# Altium PCB Driver.PcbDoc
Units mm, origin at the board's own origin, x right, y up, seen from the top; angles counter-clockwise.
Board outline 20 x 30.48 mm, 2 copper layers (Top Layer, Bottom Layer); 6 components, 14 nets, 46 pads, 4 vias.
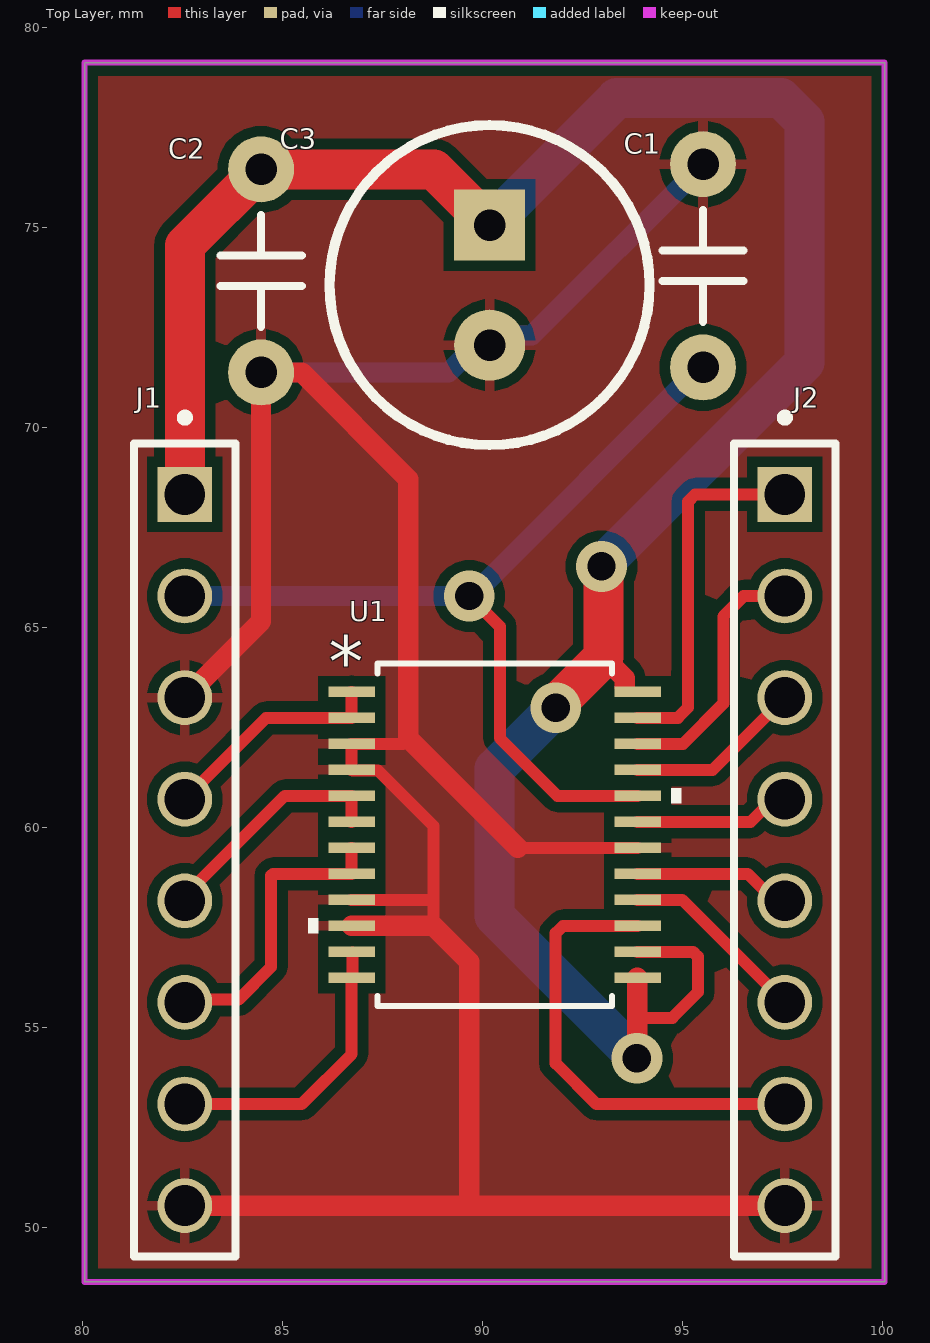
[diagram p0: Top Layer view]
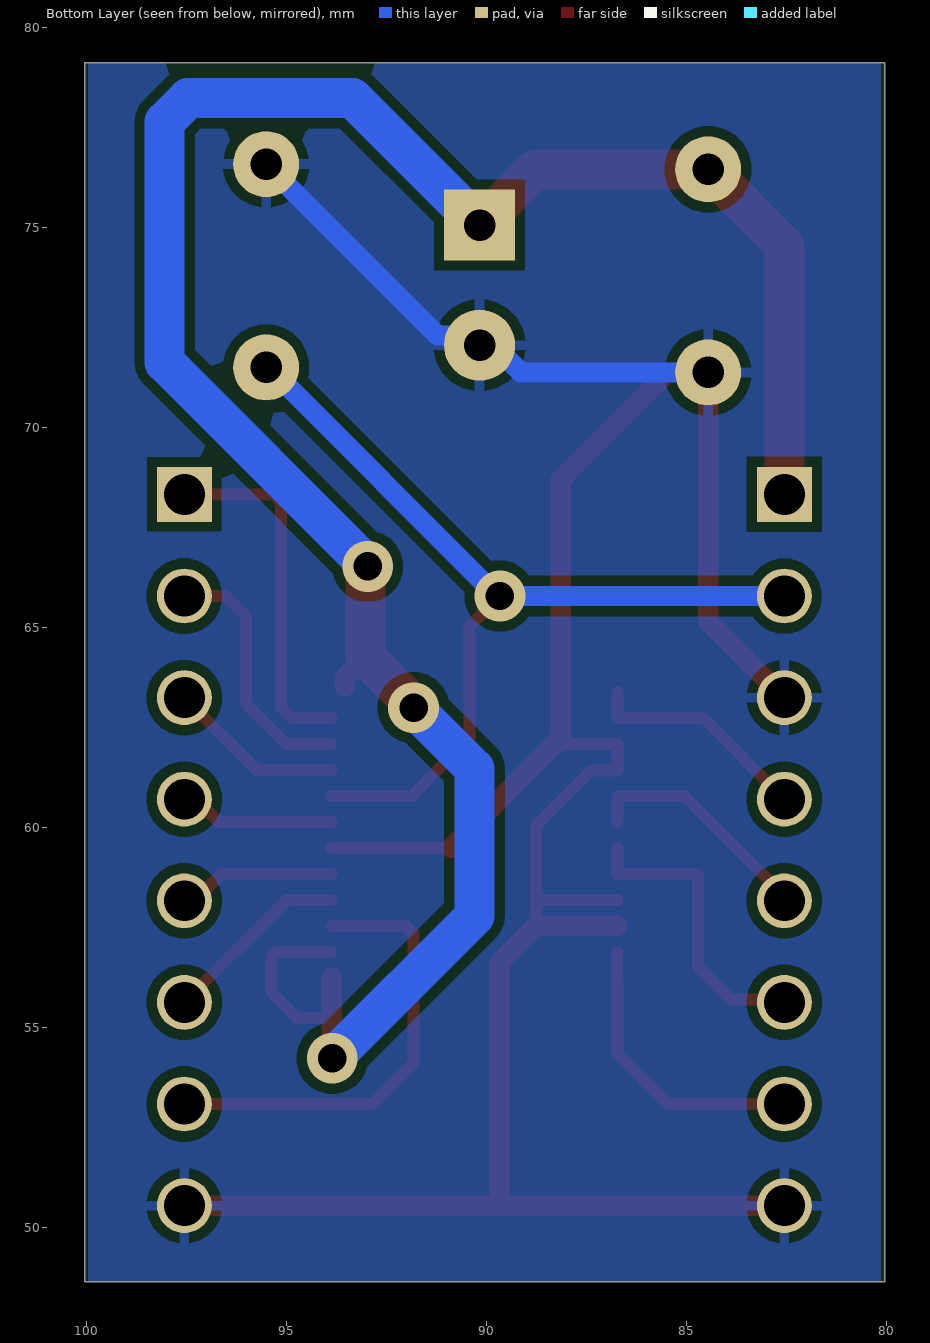
[diagram p1: Bottom Layer view, seen from below]
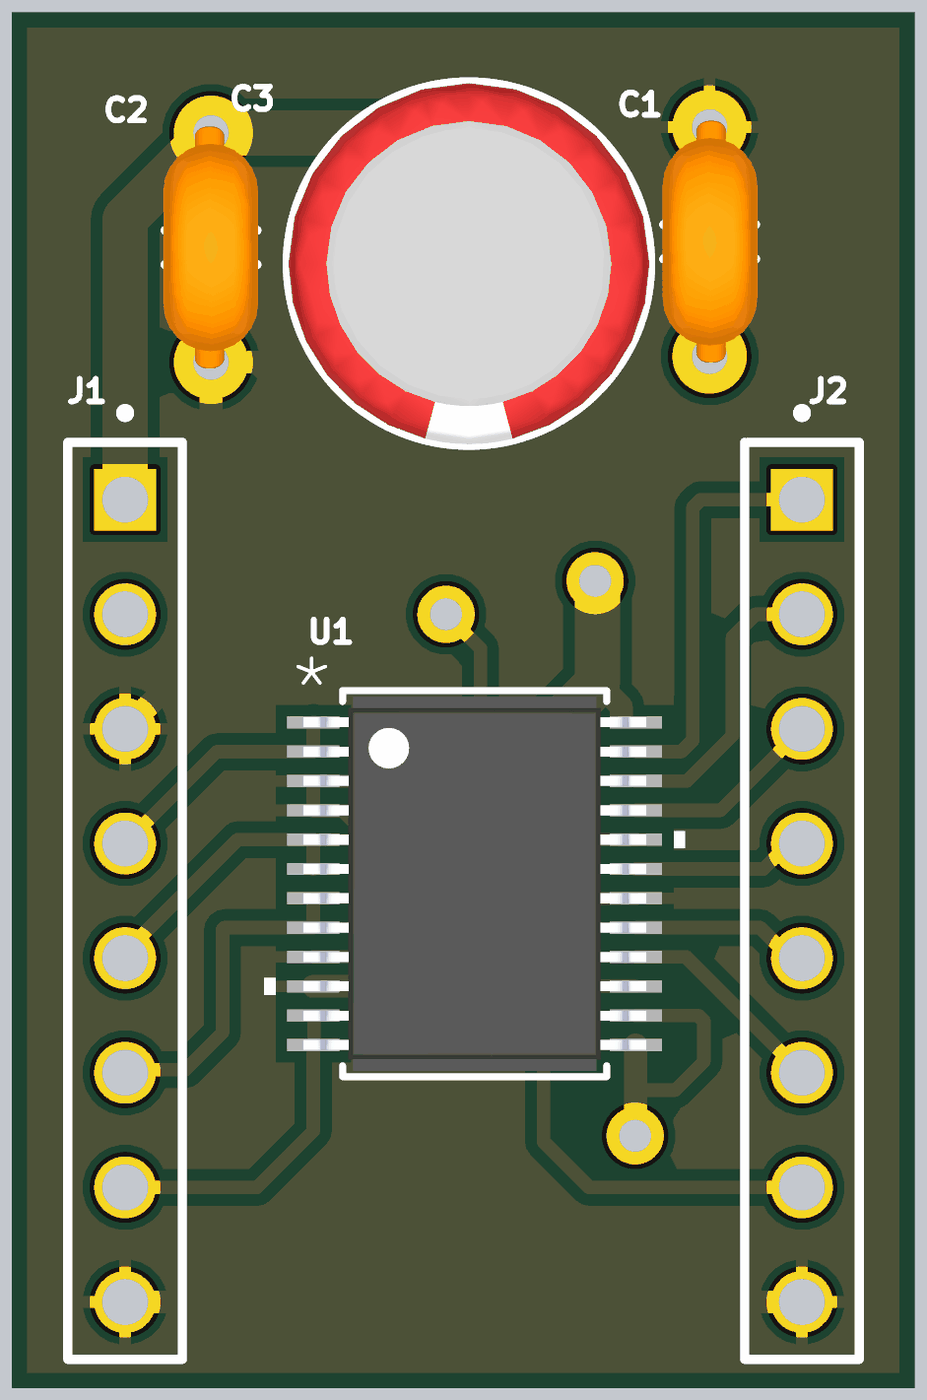
[diagram p2: 3D render of the assembled board from above, using the file's embedded part models]

## Layer stack, top to bottom
Top Solder: solder mask 0.0102, Solder Resist, Dk 3.5
Top Layer: signal copper 0.0356
Dielectric 1: dielectric 0.32, FR-4, Dk 4.8
Bottom Layer: signal copper 0.0356
Bottom Solder: solder mask 0.0102, Solder Resist, Dk 3.5

## Board outline
80.044,48.641 100.044,48.641 100.044,79.121 80.044,79.121

## Design rules (kind name [scope] priority, off if disabled: settings)
Clearance [All] p1: gap=0.254 ignorepadtopadclearanceinfootprint=FALSE
PolygonConnect [All] p1: connectstyle=Relief reliefconductorwidth=0.254 reliefentries=4 polygonreliefangle="90 Angle" airgapwidth=0.254
RoutingVias [All] p1: holewidth=0.711 width=1.27 viastyle="Through Hole" minholewidth=0.711 minwidth=1.27 maxholewidth=0.711 maxwidth=1.27
SolderMaskExpansion [All] p1: expansion=0.102 istentingtop=FALSE
SupplyNets "Schematic Supply Nets_2" [InNet('GND')] p1: voltage=0.000
SupplyNets "Schematic Supply Nets_1" [InNet('VM')] p2: voltage=0.000
SupplyNets "Schematic Supply Nets" [InNet('VCC')] p3: voltage=0.000
Width [All] p1: maxlimit=2.54 minlimit=0.3 preferedwidth=1.016
30 further rules are at their usual default settings.

## Classes and differential pairs
component class Driver: C2 C3 J1 J2

## Components (designator, comment, footprint, x,y, rotation, side; value= is the part's Value field where it differs from the comment)
C1 "104" "CAP Ceramic/W200" 95.504,71.501 r90 top
C2 "104" "CAP Ceramic/W200" 84.455,76.454 r270 top
C3 "10uF" CAP/D80/H125/LS30 90.17,73.557 r270 top
J1 "MTSW-108-08-G-S-360" SAMTEC_MTSW-108-08-G-S-360 82.55,59.436 r90 top
J2 "MTSW-108-08-G-S-360" SAMTEC_MTSW-108-08-G-S-360 97.55,59.436 r90 top
U1 "TB6612FNG,C,8,EL" SSOP24-P-300-0p65A_TOS 90.297,59.817 r0 top

## Footprints (in the part's own frame and the unit in brackets; to place one, negate y for a bottom-side part, rotate by r counter-clockwise, add the part's x,y. Pads: shape width x height; smd on the part's side, far side on the other; paste and mask are expansions set on the pad)
"CAP Ceramic/W200" [mil]
  round 65 hole 31: 1(0,0) 2(200,0)
  silkscreen extent 45,-40 155,40, body extent -6,-42 206,41, height 181
CAP/D80/H125/LS30 [mil] "Dia 8mm, Heigh 12.5mm, Lead Space 3mm (4.7uF/400V small)"
  rect 70x70 hole 31: 1(-59.06,0)
  round 70 hole 31: 2(59.06,0)
  silkscreen extent -157,-157 157,157, body extent -157,-157 157,157, height 454
SAMTEC_MTSW-108-08-G-S-360 [mm]
  rect 1.37x1.37 / inner round 1.37 / far side rect 1.37x1.37 hole 1.02: 01(8.89,0)
  round 1.37 hole 1.02: 02(6.35,0) 03(3.81,0) 04(1.27,0) 05(-1.27,0) 06(-3.81,0) 07(-6.35,0) 08(-8.89,0)
  silkscreen extent -10.16,-1.27 10.91,1.27
SSOP24-P-300-0p65A_TOS [mm]
  rect 1.161x0.271 smd paste+0 mask+0: 1(-3.575,3.575) 2(-3.575,2.925) 3(-3.575,2.275) 4(-3.575,1.625) 5(-3.575,0.975) 6(-3.575,0.325) 7(-3.575,-0.325) 8(-3.575,-0.975) 9(-3.575,-1.625) 10(-3.575,-2.275) 11(-3.575,-2.925) 12(-3.575,-3.575) 13(3.575,-3.575) 14(3.575,-2.925) 15(3.575,-2.275) 16(3.575,-1.625) 17(3.575,-0.975) 18(3.575,-0.325) 19(3.575,0.325) 20(3.575,0.975) 21(3.575,1.625) 22(3.575,2.275) 23(3.575,2.925) 24(3.575,3.575)
  silkscreen extent -4.66,-4.28 4.66,4.28, body extent -3.8,-4.15 3.8,4.15, height 1.6

## Part data
C1 C2: library part "Capacitor NP", "Capacitor non-pol"
C3: library part Capacitor, "Capacitor pol"
J1 J2: PACKAGE=None, Availability=Unavailable, MP=MTSW-108-08-G-S-360, Price=None
U1: "Description", Manufacturer_Name="Toshiba Electronic Devices & Storage Corp.", Copyright="Copyright (C) 2025 Ultra Librarian. All rights reserved.", Manufacturer_Part_Number=TB6612FNG,C,8,EL, RefDes=RefDes, TYPE=Type

## Via types
v1: diameter 1.27, hole 0.711, Top Layer to Bottom Layer, 4 vias

## Nets (pads, with @x,y where several pads share a name; then routed paths per layer and width w, separated by ;. In a path a pad name is that pad's centre, name@x,y a point inside that pad or via, vN(x,y) a via of type N, cw(c..) or ccw(c..) an arc to the next point about the centre after c; other vN are vias at no path point)
GND: C1.2 C2.2 C3.2 J1.03 J1.08 J2.08 U1.3 U1.4 U1.9 U1.10 U1.18 | length 74
  Top Layer w0.3: U1.9 88.736,58.192 88.762,58.166 ; 88.138,62.23 88,62.092 U1.3 U1.4 86.737,61.427 87.374,61.427 88.762,60.039 88.762,58.166 ; 88.762,57.542 88.762,58.166 ; 90.876,59.492 U1.18
  Top Layer w0.508: J1.08 89.789,50.546 ; J1.03 84.455,65.151 C2.2 85.471,71.374 88.138,68.707 88.138,62.23 90.876,59.492 ; U1.10 88.762,57.542 89.662,56.642 89.662,50.673 89.789,50.546 ; J2.08 89.789,50.546
  Bottom Layer w0.508: C2.2 89.143,71.374 89.826,72.057 C3.2 90.413,72.3 91.223,72.3 C1.2
NetJ1_04: J1.04 U1.1 U1.2 | length 5.7
  Top Layer w0.3: J1.04 84.582,62.738 86.718,62.738 U1.2 U1.1
NetJ1_05: J1.05 U1.5 U1.6 | length 6
  Top Layer w0.3: J1.05 82.55,58.293 85.049,60.792 U1.5 U1.6
NetJ1_06: J1.06 U1.7 U1.8 | length 7.4
  Top Layer w0.3: J1.06@82.621,55.697 83.891,55.697 84.709,56.515 84.709,58.801 ; 84.75,58.842 U1.8 U1.7
  Top Layer w1: J1.06 J1.06@82.621,55.697
NetJ1_07: J1.07 U1.11 U1.12 | length 7.2
  Top Layer w0.3: J1.07 85.471,53.086 86.719,54.334 U1.12@86.719,56.227 ; U1.12@86.738,56.257 U1.11@86.738,56.877
NetJ2_01: J2.01 U1.23 | length 9
  Top Layer w0.3: U1.23 94.873,62.742 95.133,63.002 95.133,68.15 95.309,68.326 J2.01
NetJ2_02: J2.02 U1.22 | length 6.5
  Top Layer w0.3: U1.22 95.006,62.092 96.012,63.098 96.012,65.278 96.52,65.786 J2.02
NetJ2_03: J2.03 U1.21 | length 4.4
  Top Layer w0.3: U1.21 95.746,61.442 J2.03
NetJ2_04: J2.04 U1.19 | length 3.9
  Top Layer w0.3: U1.19 96.696,60.142 97.26,60.706 J2.04
NetJ2_05: J2.05 U1.17 | length 4
  Top Layer w0.3: U1.17 96.621,58.842 97.297,58.166 J2.05
NetJ2_06: J2.06 U1.16 | length 4.7
  Top Layer w0.3: U1.16 94.984,58.192 J2.06
NetJ2_07: J2.07 U1.15 | length 11.5
  Top Layer w0.3: U1.15 92.875,57.542 92.008,57.542 91.821,57.355 91.821,54.102 92.837,53.086 J2.07
VCC: C1.1 J1.02 U1.20 | length 23.2
  Top Layer w0.3: v1(89.662,65.786) 90.424,65.024 90.424,62.23 91.862,60.792 U1.20
  Bottom Layer w0.3: v1(89.662,65.786) v1@89.725,65.786 ; C1.1@95.441,71.501 C1.1
  Bottom Layer w0.508: J1.02 v1(89.662,65.786) ; v1@89.725,65.786 C1.1@95.441,71.501
VM: C2.1 C3.1 J1.01 U1.13 U1.14 U1.24 | length 60
  Top Layer w0.3: 93.862,55.24 94.737,55.24 95.377,55.88 95.377,56.769 95.254,56.892 U1.14
  Top Layer w0.508: 93.018,64.262 93.545,63.735 U1.24@93.545,63.511 ; v1@93.862,54.238 93.862,55.24 U1.13@93.862,56.242
  Top Layer w1: J1.01 82.55,74.549 C2.1 88.773,76.454 C3.1 ; v1(91.821,62.992) 91.821,63.065 93.018,64.262 93.018,66.475 v1(92.967,66.527) ; v1(93.853,54.229) v1@93.862,54.238
  Bottom Layer w1: C3.1 93.345,78.232 97.458,78.232 98.044,77.646 98.044,71.628 92.964,66.548 92.964,66.53 v1(92.967,66.527) ; v1(91.821,62.992) 90.297,61.468 90.297,57.785 v1(93.853,54.229)

## Polygon pours and split planes (outlines as drawn)
GND on Bottom Layer "GND_L02_P000" (solid, remove dead copper, pour order 0): 80.137,79.121 99.949,79.121 99.949,48.641 80.137,48.641
GND on Top Layer "GND_L01_P001" (solid, remove dead copper, pour order 1): 80.044,79.121 100.044,79.121 100.044,48.641 80.044,48.641

## Keep-outs
Top Layer:
  the board outline again, w0.15

## Text inside footprints (layer, text, board x,y; h text height)
U1: Top Overlay "*" at 86.151,63.536 h1.27; Mechanical 13 "*" at 87.561,62.621 h1.27